# Altium PCB breather-pcb.PcbDoc
Units mm, origin at the board's own origin, x right, y up, seen from the top; angles counter-clockwise.
Board outline 54.33 x 74.28 mm, 2 copper layers (Top Layer, Bottom Layer); 61 components, 40 nets, 195 pads, 103 vias.
Unrouted connection lines stored in the file: 1.
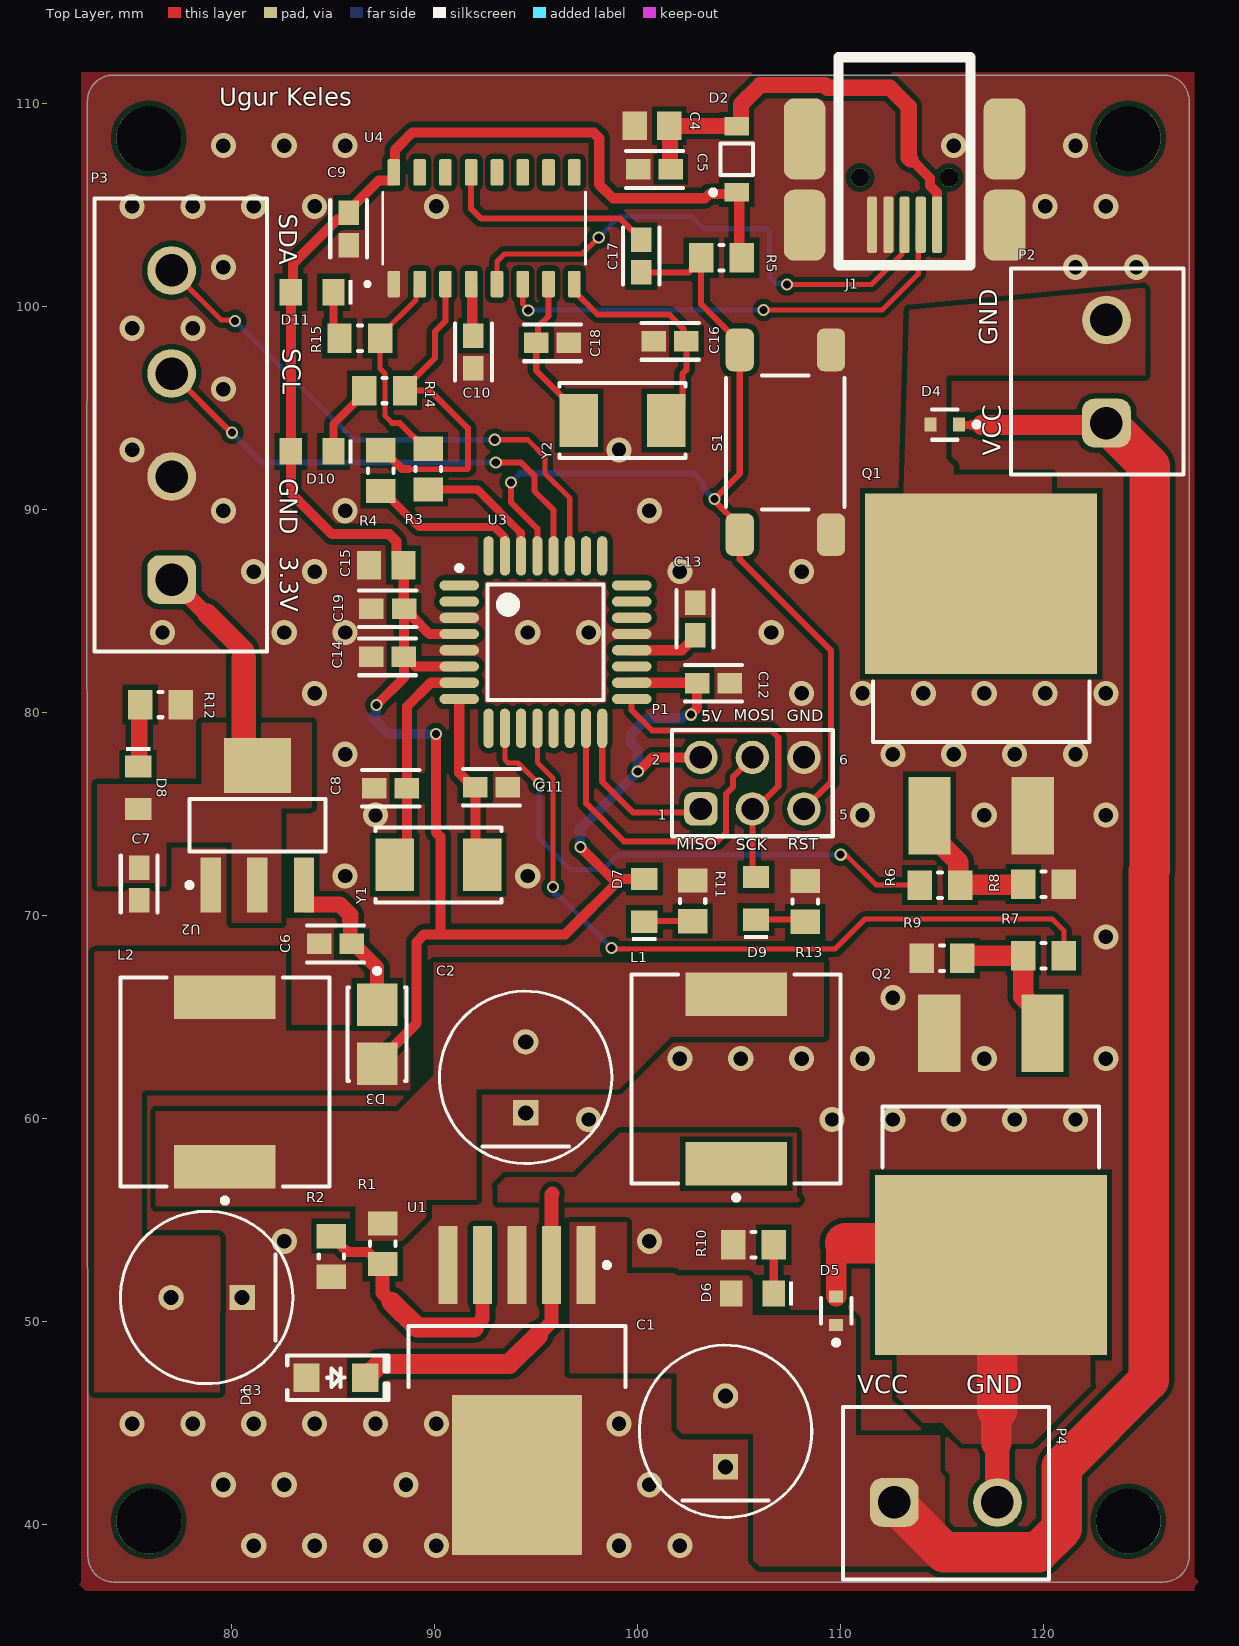
[diagram p0: Top Layer view]
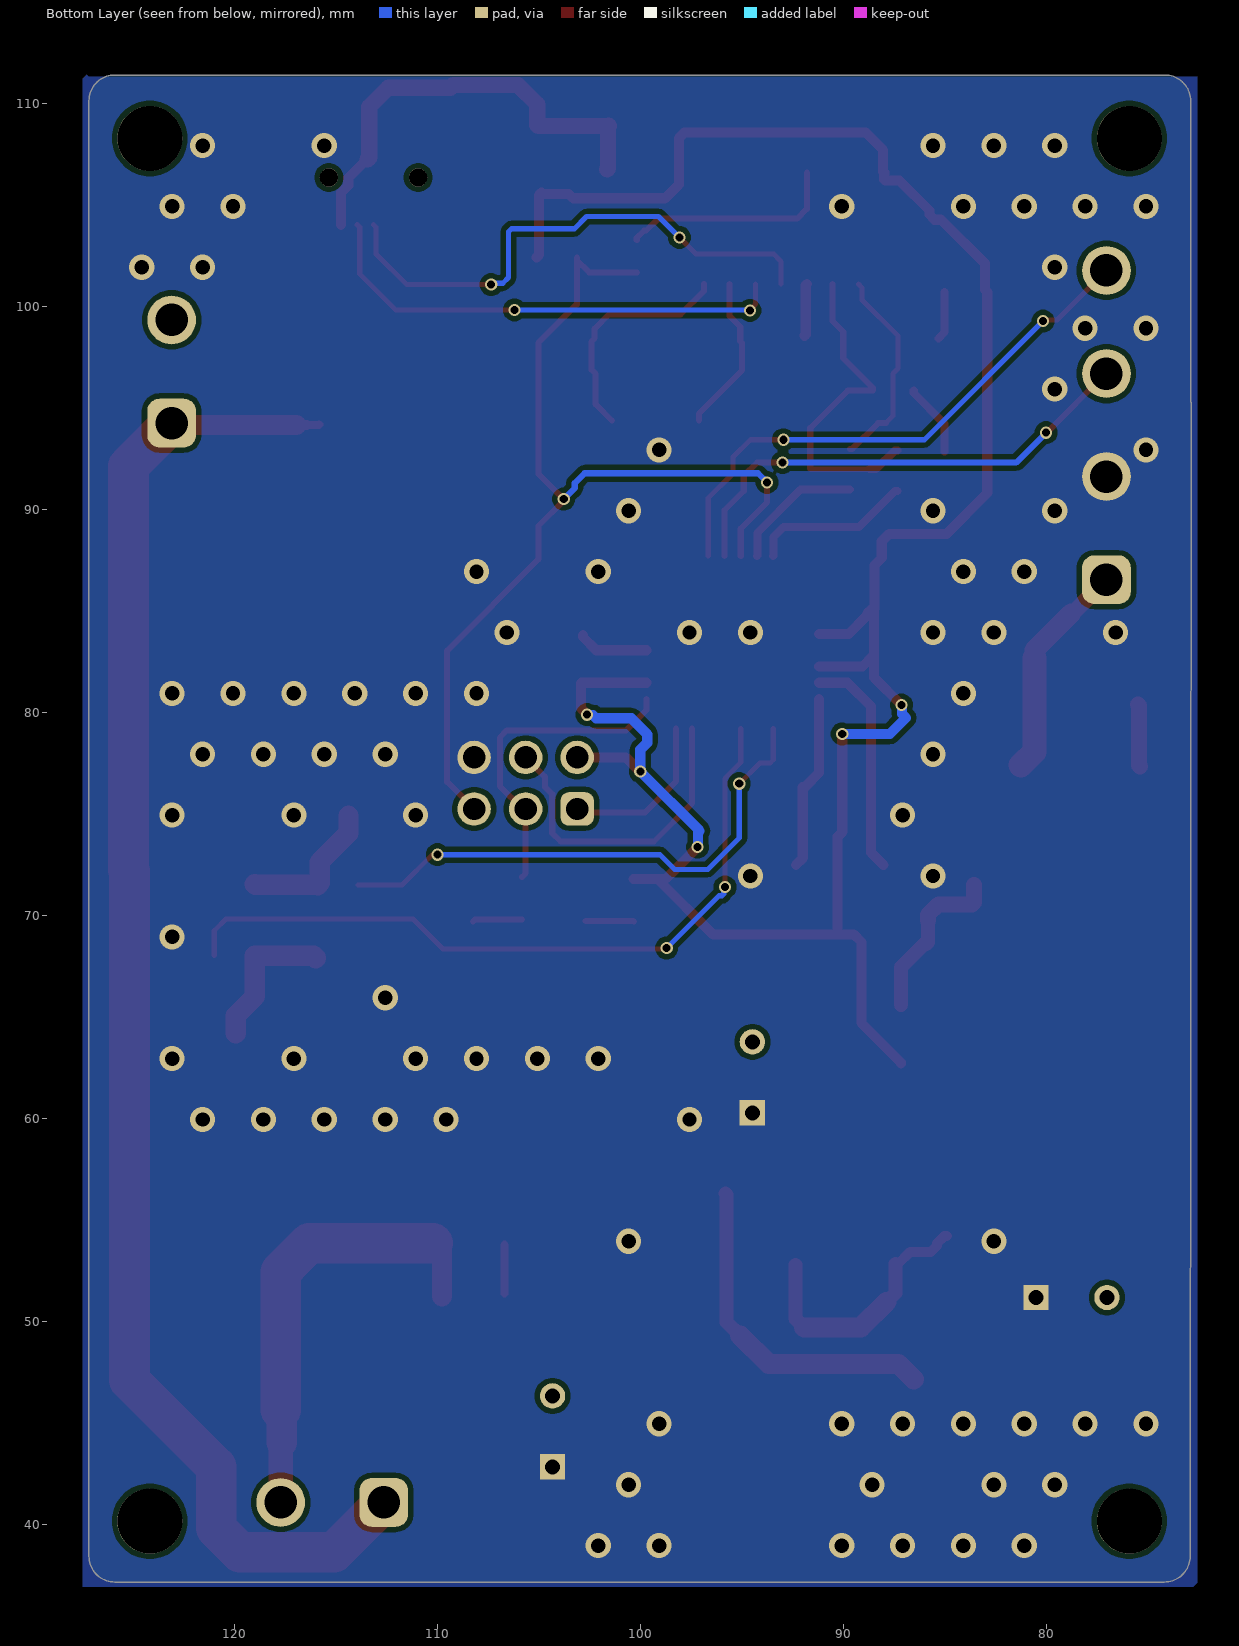
[diagram p1: Bottom Layer view, seen from below]
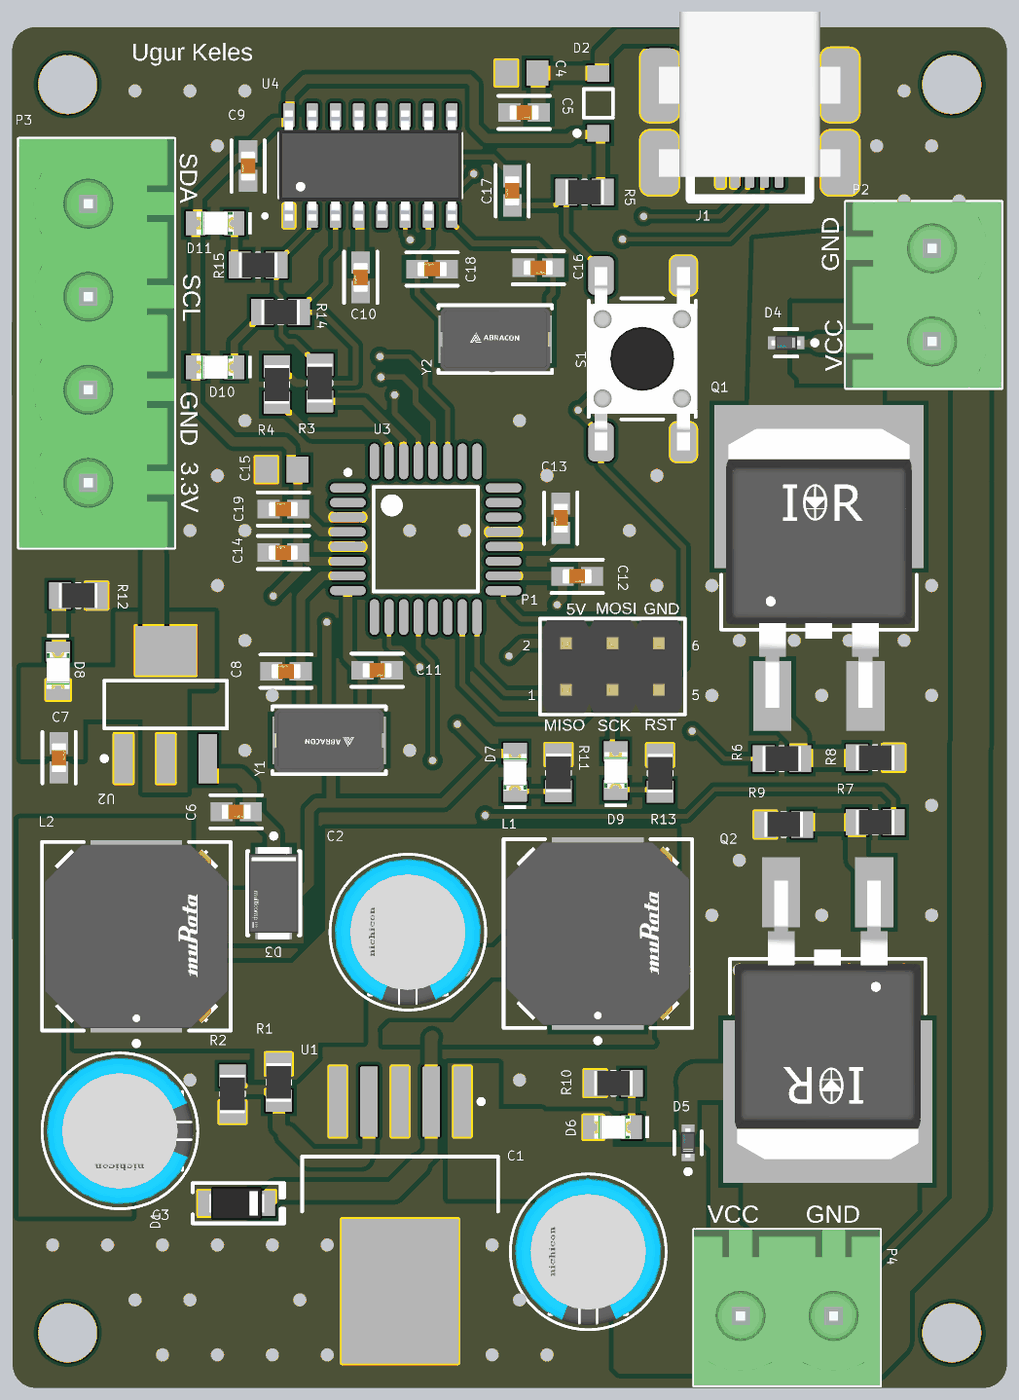
[diagram p2: 3D render of the assembled board from above, using the file's embedded part models]

## Layer stack, top to bottom
Top Solder: solder mask 0.0102, Solder Resist, Dk 3.5
Top Layer: signal copper 0.0356
Dielectric 1: dielectric 0.32, FR-4, Dk 4.8
Bottom Layer: signal copper 0.0356
Bottom Solder: solder mask 0.0102, Solder Resist, Dk 3.5

## Board outline
72.9,38.42 72.849,95.3 72.875,95.3 72.875,110.155 cw(c74.145,110.155) 74.145,111.425 125.905,111.425 cw(c125.905,110.155) 127.175,110.155 127.175,38.42 cw(c125.905,38.42) 125.905,37.15 74.17,37.15 cw(c74.17,38.42)

## Design rules (kind name [scope] priority, off if disabled: settings)
Clearance Clearance_1 [All] p1: gap=0.254 ignorepadtopadclearanceinfootprint=FALSE except(0: Arc-Hole Track-Hole SMDPad-Hole THPad-Hole Via-Hole Fill-Hole Poly-Hole Region-Hole Text-Hole)
Clearance [All] p2: gap=0.127 ignorepadtopadclearanceinfootprint=FALSE
PolygonConnect [All] p1: connectstyle=Direct reliefconductorwidth=0.254 reliefentries=4 polygonreliefangle="90 Angle" airgapwidth=0.254
RoutingVias [All] p1: holewidth=0.3 width=0.7 viastyle="Through Hole" minholewidth=0.4 minwidth=0.55 maxholewidth=0.254 maxwidth=0.8
SolderMaskExpansion [All] p1: expansion=0.102 istentingtop=FALSE
Width [All] p1: maxlimit=2 minlimit=0.2 preferedwidth=0.3 minimp=50.000000 maximp=50.000000 favimp=50.000000
30 further rules are at their usual default settings.

## Classes and differential pairs
component class power-breather: C1 C2 C3 C4 C5 C6 C7 D1 D2 D3 J1 L1 L2 R1 R2 U1 U2
component class mcu-breather: C8 C9 C10 C11 C12 C13 C14 C15 C16 C17 C18 C19 D4 D5 D6 D7 D8 D9 D10 D11 P1 P2 P3 P4 Q1 Q2 R3 R4 R5 R6 R7 R8 R9 R10 R11 R12 R13 R14 R15 S1 U3 U4 Y1 Y2

## Components (designator, comment, footprint, x,y, rotation, side; value= is the part's Value field where it differs from the comment)
C1 "100u 50V" FP-UKA1H101MPD1TD-MFG 104.325,44.575 r90 top
C2 "220u 16V" FP-UKA1H101MPD1TD-MFG 94.475,62.025 r90 top
C3 "220u 16V" FP-UKA1H101MPD1TD-MFG 78.75,51.175 r180 top
C4 "4u7" CAPC2013X135X45NL10T25 100.7,108.925 r0 top
C5 "100n" FP-GRM188-0_1-e0_2_0_55-IPC_A 100.825,106.775 r0 top
C6 "100n" FP-GRM188-0_1-e0_2_0_55-IPC_A 85.102,68.6 r0 top
C7 "10n" FP-GRM188-0_1-e0_2_0_55-IPC_A 75.425,71.55 r90 top
C8 "22p" FP-GRM188-0_1-e0_2_0_55-IPC_A 87.823,76.275 r180 top
C9 "100n" FP-GRM188-0_1-e0_2_0_55-IPC_A 85.75,103.848 r270 top
C10 "100n" FP-GRM188-0_1-e0_2_0_55-IPC_A 91.9,97.773 r270 top
C11 "22p" FP-GRM188-0_1-e0_2_0_55-IPC_A 92.798,76.325 r0 top
C12 "100n" FP-GRM188-0_1-e0_2_0_55-IPC_A 103.723,81.45 r0 top
C13 "100n" FP-GRM188-0_1-e0_2_0_55-IPC_A 102.825,84.627 r270 top
C14 "100n" FP-GRM188-0_1-e0_2_0_55-IPC_A 87.673,82.75 r180 top
C15 "4u7" CAPC2013X135X45NL10T25 87.6,87.275 r180 top
C16 "22p" FP-GRM188-0_1-e0_2_0_55-IPC_A 101.598,98.3 r0 top
C17 "100n" FP-GRM188-0_1-e0_2_0_55-IPC_A 100.175,102.498 r270 top
C18 "22p" FP-GRM188-0_1-e0_2_0_55-IPC_A 95.798,98.225 r180 top
C19 "100n" FP-GRM188-0_1-e0_2_0_55-IPC_A 87.677,85.125 r180 top
D1 "VTVS3V3GSMF-M3-08" "SMF DO-219AB" 85.125,47.225 r0 top
D2 "MBR0520LT3G" ONSC-SOD-123-2-425-04_V 104.875,107.275 r90 top
D3 "1N4007 SMD" FP-1N4007_SMD-IPC_C 87.15,64.15 r270 top
D4 "1N4148WT-7" FP-SOD523-MFG 115.125,94.2 r180 top
D5 "1N4148WT-7" FP-SOD523-MFG 109.775,50.525 r90 top
D6 "150080RS75000" WL-SMCW_0805_150080xx75000 105.65,51.375 r180 top
D7 "150080RS75000" WL-SMCW_0805_150080xx75000 100.325,70.75 r90 top
D8 "150080RS75000" WL-SMCW_0805_150080xx75000 75.375,76.3 r270 top
D9 "150080RS75000" WL-SMCW_0805_150080xx75000 105.825,70.85 r90 top
D10 "150080RS75000" WL-SMCW_0805_150080xx75000 83.95,92.875 r180 top
D11 "150080RS75000" WL-SMCW_0805_150080xx75000 83.95,100.725 r180 top
J1 "67503-1020" MOLX-67503-1020_V 114.75,104.05 r270 top
L1 "33uH" FP-DEM10050C-MFG 104.85,61.95 r90 top
L2 "33uH" FP-DEM10050C-MFG 79.65,61.8 r90 top
P1 "61300621121" 61300621121 105.65,76.525 r0 top
P2 "691311500002" 691311500002 122.65,96.815 r90 top
P3 "691311500104" 691311500104 77.475,94.175 r90 top
P4 "691311500002" 691311500002 115.185,41.525 r0 top
Q1 "IRLZ44N" FP-PG-TO263-3-MFG 116.925,81.905 r0 top
Q2 "IRLZ44N" FP-PG-TO263-3-MFG 117.4,57.22 r180 top
R1 "3K" RESC2013X60X35ML10T20 87.425,53.825 r90 top
R2 "1K" RESC2013X60X35ML10T20 84.9,53.2 r90 top
R3 "1K" RESC2013X60X35ML10T20 89.675,92 r90 top
R4 "1K" RESC2013X60X35ML10T20 87.325,91.925 r90 top
R5 "1K" RESC2013X60X35ML10T20 104.125,102.425 r0 top
R6 "220R" RESC2013X60X35ML10T20 114.9,71.5 r180 top
R7 "220R" RESC2013X60X35ML10T20 120,68.025 r0 top
R8 "10K" RESC2013X60X35ML10T20 120,71.55 r0 top
R9 "10K" RESC2013X60X35ML10T20 115,67.9 r180 top
R10 "10K" RESC2013X60X35ML10T20 105.7,53.775 r180 top
R11 "1K" RESC2013X60X35ML10T20 102.7,70.725 r270 top
R12 "1K" RESC2013X60X35ML10T20 76.475,80.4 r180 top
R13 "220R" RESC2013X60X35ML10T20 108.25,70.7 r90 top
R14 "1K" RESC2013X60X35ML10T20 87.525,95.875 r180 top
R15 "1K" RESC2013X60X35ML10T20 86.3,98.45 r180 top
S1 "1977223-9" "TE FSM4JSMA" 107.275,93.325 r180 top
U1 "LM2596SX-ADJ/NOPB" KTT0005B_L 94.05,46.575 r270 top
U2 "AMS1117" SOT-223_M 81.25,74.45 r90 top
U3 "ATmega328P-AU" 32A_M 95.45,83.475 r0 top
U4 "CH340G" SOIC127P600X180-16N 92.425,103.875 r90 top
Y1 "16MHZ" FP-ABM7-MFG 90.175,72.5 r180 top
Y2 "12MHZ" FP-ABM7-MFG 99.25,94.4 r0 top

## Footprints (in the part's own frame and the unit in brackets; to place one, negate y for a bottom-side part, rotate by r counter-clockwise, add the part's x,y. Pads: shape width x height; smd on the part's side, far side on the other; paste and mask are expansions set on the pad)
32A_M [mm] "Thin QFP, 32-Leads, Body 7x7mm, Pitch 0.8mm, IPC Low Density"
  oval 1.95x0.5 smd: 1(-4.25,2.8) 2(-4.25,2) 3(-4.25,1.2) 4(-4.25,0.4) 5(-4.25,-0.4) 6(-4.25,-1.2) 7(-4.25,-2) 8(-4.25,-2.8) 17(4.25,-2.8) 18(4.25,-2) 19(4.25,-1.2) 20(4.25,-0.4) 21(4.25,0.4) 22(4.25,1.2) 23(4.25,2) 24(4.25,2.8)
  oval 0.5x1.95 smd: 9(-2.8,-4.25) 10(-2,-4.25) 11(-1.2,-4.25) 12(-0.4,-4.25) 13(0.4,-4.25) 14(1.2,-4.25) 15(2,-4.25) 16(2.8,-4.25) 25(2.8,4.25) 26(2,4.25) 27(1.2,4.25) 28(0.4,4.25) 29(-0.4,4.25) 30(-1.2,4.25) 31(-2,4.25) 32(-2.8,4.25)
  silkscreen extent -4.37,-2.85 2.85,3.77, body extent -3.5,-3.5 3.5,3.5, height 1.2
61300621121 [mm] "Pin Header, pitch 2.54 mm, THT, Vertical, dual row, 6p"
  rrect50% 1.65x1.65 hole 1.1: 1(-2.54,-1.27)
  round 1.65 hole 1.1: 2(-2.54,1.27) 3(0,-1.27) 4(0,1.27) 5(2.54,-1.27) 6(2.54,1.27)
  silkscreen extent -3.96,-2.62 3.96,2.62, body extent -3.81,-2.54 3.81,2.54, height 8.59
691311500002 [mm] "5,08mm - PCB Headers - Vertical - Opened ends -02p"
  rrect50% 2.4x2.4 hole 1.6: 1(-2.54,-0.45)
  round 2.4 hole 1.6: 2(2.54,-0.45)
  silkscreen extent -5.08,-4.25 5.08,4.25, body extent -5.08,-4.25 5.08,4.25, height 12.05
691311500104 [mm] "5,08mm - PCB Headers - Vertical - Closed ends -04p"
  rrect50% 2.4x2.4 hole 1.6: 1(-7.62,0.45)
  round 2.4 hole 1.6: 2(-2.54,0.45) 3(2.54,0.45) 4(7.62,0.45)
  silkscreen extent -11.16,-4.25 11.16,4.25, body extent -11.16,-4.25 11.16,4.25, height 12.05
CAPC2013X135X45NL10T25 [mm] "Chip Capacitor, 2-Leads, Body 2.00x1.25mm, IPC Medium Density"
  rect 1.2x1.4 smd: 1(-0.85,0) 2(0.85,0)
  body extent -1.05,-0.67 1.05,0.67, height 1.35
FP-1N4007_SMD-IPC_C [mm]
  rect 2.1x2 smd paste+0 mask+0: 1(-1.45,0) 2(1.45,0)
  silkscreen extent -3.25,-1.45 2.3,1.45, body extent -2.6,-1.55 2.6,1.55, height 0.25
FP-ABM7-MFG [mm]
  rect 1.9x2.6 smd paste+0 mask+0: 1(-2.15,0) 2(2.15,0)
  silkscreen extent -3.1,-1.85 3.1,1.85, body extent -3.2,-1.95 3.2,1.95, height 0.25
FP-DEM10050C-MFG [mm]
  rect 2.15x5 smd paste+0 mask+0: 1(-4.175,0) 2(4.175,0)
  silkscreen extent -5.97,-5.15 5.15,5.15, body extent -5.35,-5.25 5.35,5.25, height 0.25
FP-GRM188-0_1-e0_2_0_55-IPC_A [mm]
  rect 1.208x1.012 smd paste+0 mask+0: 1(-0.802,0) 2(0.802,0)
  silkscreen extent -1.41,-0.91 1.41,0.91, body extent -1.91,-1.01 1.91,1.01, height 0.25
FP-PG-TO263-3-MFG [mm]
  rect 2.08x3.81 smd paste+0 mask+0: 1(-2.54,-6.985) 3(2.54,-6.985)
  rect 11.43x8.89 smd paste+0 mask+0: 4(0,4.445)
  silkscreen extent -5.34,-3.36 5.34,-0.38, body extent -5.81,-8.99 5.81,8.99, height 0.25
FP-SOD523-MFG [mm]
  rect 0.6x0.7 smd paste+0 mask+0: 1(-0.7,0) 2(0.7,0)
  silkscreen extent -1.7,-0.75 0.63,0.75, body extent -1.1,-0.53 1.1,0.53, height 0.25
FP-UKA1H101MPD1TD-MFG [mm]
  rect 1.25x1.25 hole 0.75 paste-2539.97 mask+0: 1(-1.75,0)
  round 1.25 hole 0.75 paste-2539.97 mask+0: 2(1.75,0)
  silkscreen extent -4.25,-4.25 4.25,4.25, body extent -4.35,-4.35 4.35,4.35, height 0.25
KTT0005B_L [mm] "DPAK, 5-Leads, Body 10.65x9.65mm, Pitch 1.7mm, IPC High Density"
  rrect11% 3.85x0.95 smd: 1(-6.2,3.4) 2(-6.2,1.7) 3(-6.2,0) 4(-6.2,-1.7) 5(-6.2,-3.4)
  rrect2% 7.9x6.4 smd: 6(4.15,0)
  silkscreen extent -6.32,-5.35 -0.2,5.35, body extent -3.2,-5.32 6.45,5.33, height 4.83
MOLX-67503-1020_V [mm] "Mini USB Connector, SMT, Righer Angle"
  rrect50% 2.8x0.5 smd: 1(0,0) 2(0,-0.8) 3(0,-1.6) 4(0,-2.4) 5(0,-3.2)
  rrect50% 3.5x2.05 smd: 6(0.025,3.325) 8(0.025,-6.525)
  rrect50% 4x2.05 smd: 7(-4.225,3.325) 9(-4.225,-6.525)
  round 0.9 hole 0.9 unplated: X(-2.325,-3.8) Y(-2.325,0.6)
  silkscreen extent -8.25,-4.85 2,1.65, body extent -8.22,-6.56 0.78,3.34, height 3.95
ONSC-SOD-123-2-425-04_V [mm] "SOD, 2-Leads, Body 2.69x1.6mm"
  rect 0.91x1.22 smd: 1(-1.635,0) 2(1.635,0)
  silkscreen extent -1.76,-0.8 0.78,1.28, body extent -1.35,-0.8 1.35,0.8, height 1.35
RESC2013X60X35ML10T20 [mm] "Chip Resistor, 2-Leads, Body 2.1x1.35mm, IPC Low Density"
  rect 1.2x1.45 smd: 1(-1,0) 2(1,0)
  silkscreen extent -0.1,-0.63 0.1,0.63, body extent -1.05,-0.68 1.05,0.67, height 0.6
"SMF DO-219AB" [mm] "Molded Diode, 2-Leads, Body 3.90x1.90mm, IPC Medium Density"
  rect 1.3x1.4 smd: 1(-1.45,0) 2(1.45,0)
  silkscreen extent -2.4,-1.1 2.59,1.1, body extent -1.5,-0.9 1.5,0.9, height 1.18
SOIC127P600X180-16N [mm]
  rrect25% 1.31x0.62 smd: 1(-2.75,4.445) 2(-2.75,3.175) 3(-2.75,1.905) 4(-2.75,0.635) 5(-2.75,-0.635) 6(-2.75,-1.905) 7(-2.75,-3.175) 8(-2.75,-4.445) 9(2.75,-4.445) 10(2.75,-3.175) 11(2.75,-1.905) 12(2.75,-0.635) 13(2.75,0.635) 14(2.75,1.905) 15(2.75,3.175) 16(2.75,4.445)
  silkscreen extent -2.85,-5 1.78,5.85, body extent -3,-5 3,5, height 1.8
SOT-223_M [mm] "SOT223, 4-Leads, Body 6.5x3.5mm, Pitch 2.3mm, Lead Span 7mm, IPC Low Density"
  rect 2.7x1 smd: 1(-2.95,2.3) 2(-2.95,0) 3(-2.95,-2.3)
  rect 2.7x3.3 smd: 4(2.95,0)
  silkscreen extent -3.07,-3.35 1.3,3.47, body extent -1.85,-3.35 1.85,3.35, height 1.8
"TE FSM4JSMA" [mm]
  rrect50% 1.4x2.1 smd: 1(2.25,4.55) 2(2.25,-4.55) 3(-2.25,4.55) 4(-2.25,-4.55)
  silkscreen extent -2.92,-3.3 2.92,3.3, body extent -3,-5 3,5, height 5.08
WL-SMCW_0805_150080xx75000 [mm] "SMD Mono-color Chip LED, body 2.0x1.25mm"
  rect 1.1x1.3 smd: 1(-1.05,0) 2(1.05,0)
  silkscreen extent -2,-0.6 -1.8,0.6, body extent -1,-0.63 1,0.62, height 0.7

## Part data
C1 C2 C3: library part CMP-12462-000027-1, "CAP ALUM 100UF 20% 50V RADIAL", Capacitance=100uF, Case/Package=Radial, Leakage Current=4uA, Max Operating Temperature=105°C, Min Operating Temperature=-55°C, Package Quantity=1, Ripple Current=190mA, Tolerance=20%, Voltage Rating=50V, Diameter=8mm, Height=11.5mm, Height - Seated (Max)=0.512inch, Lead Pitch=3.5mm, Length=11.5mm, Life (Hours)=2000Hour, Mount="Through Hole", Packaging="Tape and Reel", REACH SVHC="No SVHC", Series=KA, Termination=Radial, Voltage Rating (DC)=50V
C4 C15: library part CMP-2007-03607-1, Manufacturer=Murata, Part Number=GRM21BR72E103KW03L
C5 C6 C7 C8 C9 C10 C11 C12 C13 C14 C16 C17 C18 C19: library part CMP-2006-02792-2, "Chip Multilayer Ceramic Capacitors for General Purpose, 0603, 10uF, X5R, 15%, 20%, 6.3V", Capacitance=10uF, Case Code (Metric)=1608, Case Code (Imperial)=0603, Dielectric=X5R, Max Operating Temperature=85°C, Min Operating Temperature=-55°C, Package Quantity=4000, Tolerance=20%, Voltage=6.3V, Case/Package=0603, Depth=0.8mm, Height=0.8mm, Lead Free="Lead Free", Length=1.6mm, Material=Ceramic, Mount="Surface Mount", Packaging="Tape and Reel", Radiation Hardening=No, REACH SVHC="No SVHC", Termination=SMD/SMT, Thickness=0.035inch, Voltage Rating=6.3V, Voltage Rating (DC)=6.3V, Width=0.031inch
D1: "ESD PROTECTION DIODE DO-219AB-M3", Capacitance @ Frequency="2095pF @ 1MHz", Current - Peak Pulse (10/1000µs)=43.99A, Manufacturer="Vishay Semiconductor Diodes Division", Operating Temperature="175°C (TJ)", Package / Case=DO-219AB, Power - Peak Pulse=400W, Power Line Protection=No, Supplier Device Package="DO-219AB (SMF)", Supplier Part Number 1=VTVS3V3GSMF-M3-08GICT-ND, Voltage - Breakdown (Min)=6.57V, Voltage - Clamping (Max) @ Ipp=8.9V, Voltage - Reverse Standoff (Typ)=3.3V, Applications="General Purpose", ComponentLink1Description=Datasheet, ComponentLink1URL=http://www.vishay.com/docs/85891/vtvs3v3asmf.pdf, ComponentLink2Description="DigiKey Link", ComponentLink2URL=http://digikey.com/product-detail/en/vishay-semiconductor-diodes-division/VTVS3V3GSMF-M3-08/VTVS3V3GSMF-M3-08GICT-ND/9467503, LastUpdated="2/8/2024 9:51:14 PM", Lifecycle Status=Active, Minimum Order=1, Mounting Type="Surface Mount", Packaging=TapeAndReel, Part Number=VTVS3V3GSMF-M3-08, Part Status=Active, PartId=5497, Price=0.21, Series=TransZorb®, Supplier 1=DigiKey, Type=Zener, Unidirectional Channels=1
D2: library part CMP-1055-00408-1, "Schottky Power Rectifier, 2-Pin SOD-123, Pb-Free, Tape and Reel", Manufacturer="On Semiconductor", ComponentLink1Description="Manufacturer URL", ComponentLink1URL=http://www.onsemi.com/, ComponentLink2Description=Datasheet, ComponentLink2URL=http://www.onsemi.cn/pub_link/Collateral/MBR0520LT1-D.PDF, ComponentLink3Description="Package Specification", ComponentLink3URL=http://www.onsemi.com/pub_link/Collateral/425-04.PDF, Configuration=Single, DatasheetVersion="Rev. 6", Mounting Technology="Surface Mount", PackageDescription="2-Pin SOD, Body 1.6 x 2.69 mm", PackageReference=SOD-123-2-425-04, PackageVersion="Rev. G, 10/2009", Packing="Tape and Reel", PartNumber=MBR0520LT3G, RoHS=TRUE, IFSM Max (A)=5.5
D3: library part CMP-12389-000001-1, "Rectifier, 1Kv, 1A, Do-214Ac Rohs Compliant: Yes"
D4 D5: library part CMP-2000-05518-3, "DIODE GEN PURP 80V 125MA SOD523", Average Rectified Current=125mA, Capacitance=2pF, Forward Current=250mA, Forward Voltage=1.25V, Max Forward Surge Current (Ifsm)=2A, Max Operating Temperature=150°C, Max Repetitive Reverse Voltage (Vrrm)=100V, Max Reverse Voltage (DC)=80V, Min Operating Temperature=-65°C, Package Quantity=3000, Peak Reverse Current=1uA, Power Dissipation=150mW, Contact Plating=Tin, Current Rating=125mA, Element Configuration=Single, Height=0.65mm, Lead Free="Lead Free", Length=0.9mm, Max Surge Current=2A, Mount="Surface Mount", Number of Pins=2, Output Current=125mA, Packaging="Tape and Reel", Peak Non-Repetitive Surge Current=2A, Polarity=Standard, Power Rating=150mW, Radiation Hardening=No, REACH SVHC="No SVHC", Recovery Time=4ns, Reverse Recovery Time=4ns, Voltage Rating (DC)=80V, Weight=3.5E-05oz, Width=1.3mm
D6 D7 D8 D9 D10 D11: library part CMP-1426-00011-2, Case Code (Metric)=2012, Case Code (Imperial)=0805, Color=Red, Forward Current=100mA, Forward Voltage=2V, Max Operating Temperature=85°C, Max Reverse Voltage (DC)=5V, Min Operating Temperature=-40°C, Test Current=20mA, Case/Package=0805, Dominant Wavelength=625nm, Height=700µm, Length=2mm, Lens Style="Clear, Rectangular", Luminous Intensity=150mcd, Mount="Surface Mount", NexarPartId=29717781, Packaging="Tape and Reel", Peak Wavelength=630nm, REACH SVHC=Unknown, RoHS=Compliant, Viewing Angle=140°, Wavelength=625nm, Width=1.25mm
J1: library part CMP-0411-00002-1, "USB, MINI, SMD, RA KME04-USBMU03A01", Manufacturer=Molex, ComponentLink1Description="Manufacturer URL", ComponentLink1URL=http://www.molex.com/, ComponentLink2Description=Datasheet, ComponentLink2URL=http://www.molex.com/pdm_docs/sd/675031020_sd.pdf, DatasheetVersion="Rev F, 06/2009", Mounting Technology="Surface Mount", PackageDescription="Mini USB Connector, SMT, Righer Angle", PackageReference=67503-1020, PartNumber=67503-1020, Terminal Pitch="0.8 mm"
L1 L2: library part CMP-06042-015462-1, "Shielded Wirewound Inductor 33uH 20% 2500mA 0.0936Ω SMD", Case/Package=SMD/SMT, Current Rating=2.5A, DC Resistance (DCR)=93.6mR, Resistor Type=Wirewound, Saturation Current=3.5A, Test Frequency=100kHz, Tolerance=20%, Core Material=Ferrite, Height - Seated (Max)=0.197inch, Length=0.394inch, Max DC Current=2.5A, Mount="Surface Mount", Number of Pins=2, Packaging="Tape and Reel", Shielding=Shielded, Width=0.394inch, Inductance=33uH
P1: library part CMP-1502-01072-2, Color=Black, Contact Resistance=20mΩ, Current Rating=3A, Max Operating Temperature=105°C, Min Operating Temperature=-40°C, Operating Supply Voltage=250V, Connector Type="Male Pin", Contact Material=Copper, Contact Mating Length=5.9944mm, Contact Plating=Gold, Gender=Male, Height=8.89mm, Lead Pitch=2.54mm, Mount="Through Hole", NexarPartId=32855529, Number of Contacts=6, Number of Pins=6, Number of Positions=6, Number of Rows=2, Orientation=Vertical, Packaging=Bulk, Pitch=2.54mm, REACH SVHC=Unknown, RoHS=Compliant, Row Spacing=2.54mm, Termination=Solder, Voltage Rating=250V
P2 P4: library part CMP-1502-02123-2, Color=Green, Current=20A, Voltage=300V, Contact Material=Brass, Contact Plating=Tin, Gender=Male, Height=12mm, Lead Pitch=5.08mm, Length=8.5mm, Mount="Through Hole", NexarPartId=8917741, Number of Contacts=2, Number of Levels=1, Number of Pins=2, Number of Positions Per Level=2, Number of Rows=1, Orientation=Vertical, Packaging=Box, Pitch=5.08mm, REACH SVHC=Unknown, RoHS=Compliant, Termination=Solder, Width=10.16mm
P3: library part CMP-1502-02148-2, Color=Green, Current=20A, Voltage=300V, Contact Material=Brass, Contact Plating=Tin, Gender=Male, Height=12mm, Lead Pitch=5.08mm, Length=8.5mm, Mount="Through Hole", NexarPartId=8917749, Number of Contacts=4, Number of Levels=1, Number of Pins=4, Number of Positions Per Level=4, Number of Rows=1, Orientation=Vertical, Packaging=Box, Pitch=5.08mm, REACH SVHC=Unknown, RoHS=Compliant, Termination=Solder, Width=22.32mm
Q1 Q2: library part CMP-32901-000495-1, "MOSFET N-CH 55V 47A D2PAK - IRLZ44NSTRLPBF", Case/Package=D2PAK, Continuous Drain Current (ID)=47A, Drain to Source Breakdown Voltage=55V, Drain to Source Resistance=35mR, Gate to Source Voltage (Vgs)=16V, Max Operating Temperature=175°C, Max Power Dissipation=3.8W, Min Operating Temperature=-55°C, Power Dissipation=110W, Threshold Voltage=2V, Input Capacitance=1.7nF, Drain to Source Voltage (Vdss)=55V, Element Configuration=Single, Halogen Free="Halogen Free", Height=0.19inch, Lead Free="Contains Lead", Length=0.42inch, Max Dual Supply Voltage=55V, Mount="Surface Mount", Number of Pins=3, Packaging="Tape and Reel", Rds On Max=22mR, REACH SVHC="No SVHC", RoHS Compliant=Yes, Turn-Off Delay Time=26ns, Turn-On Delay Time=11ns, Width=0.38inch
R1 R2 R3 R4 R5 R6 R7 R8 R9 R10 R11 R12 R13 R14 R15: library part CMP-2100-03671-1, "Chip Resistor, 1 KOhm, +/- 1%, 125 mW, -55 to 155 degC, 0805 (2012 Metric), RoHS, Tape and Reel", Case Code (Metric)=2012, Case Code (Imperial)=0805, Manufacturer=Yageo, Max Operating Temperature=155degC, Max Power Dissipation=125mW, Min Operating Temperature=-55degC, Package Description="2-Pin Surface Mounted Device, Body 2 x 1.25 mm", Package Quantity=1, Resistance=1KOhm, Temperature Coefficient=100ppm/degreesC, Tolerance=1%, Voltage Rating=150V, Case/Package=0805, Composition=ThickFilm, Datasheet URL=http://www.yageo.com/NewPortal/yageodocoutput?fileName=/pdf/R-Chip/PYu-RC_Group_51_RoHS_L_5.pdf, Datasheet Version="Rev. 5, 10/2016", Depth=1.25mm, Height=0.024inch, Lead Free=LeadFree, Length=0.079inch, Manufacturer URL=http://www.yageo.com/, Military Standard=Not, Number of Pins=2, Number of Terminations=2, Package Reference=0805, Packaging=TapeandReel, Power Rating=125mW, REACH SVHC=Unknown, RoHSCompliant=true, Termination=SMD/SMT, Voltage Rating (DC)=150V, Width=0.049inch
S1: "SWITCH TACTILE SPST-NO 0.05A 24V", Contact Rating @ Voltage="0.05A @ 24VDC", Manufacturer="TE Connectivity ALCOSWITCH Switches", Operating Force=160gf, Supplier Part Number 1=1977223-9-ND, Actuator Height off PCB, Vertical=5.00mm, Actuator Orientation="Top Actuated", Actuator Type=Standard, Circuit=SPST-NO, ComponentLink1Description=Datasheet, ComponentLink1URL=https://www.te.com/commerce/DocumentDelivery/DDEController?Action=srchrtrv&DocNm=1308111-1_SWITCHES_CORE_PROGRAM_CATALOG&DocType=CS&DocLang=English, ComponentLink2Description="DigiKey Link", ComponentLink2URL=http://digikey.com/product-detail/en/te-connectivity-alcoswitch-switches/1977223-9/1977223-9-ND/5597033, Illumination=Non-Illuminated, LastUpdated="8/30/2020 9:06:45 PM", Lifecycle Status=Active, Minimum Order=30000, Mounting Type="Surface Mount", Outline="6.00mm x 6.00mm", Packaging=Bulk, Part Number=1977223-9, Price=0.16, Series=FSMJSMA, Supplier 1=DigiKey, Switch Function=Off-Mom, Termination Style="Gull Wing"
U1: library part CMP-2000-06545-1, "Simple Switcher(R) Power Converter 150 kHz Step-Down Voltage Regulator, 3 A, 4.5 to 40 V, -40 to 125 degC, 5-Pin TO-263 (KTT), Green (RoHS & no Sb/Br), Tape and Reel", Manufacturer="Texas Instruments", Operating Temperature Max=125°C, Operating Temperature Min=-40°C, Operating Temperature Range=-40°Cto+125°C, Output Current=3A, Output Voltage=37V, Package Description="5-Pin Plastic Flange Mount, Body 10.16 x 8.925 mm, Pitch 1.7 mm", Package Reference=KTT5, Package Version="4200577-4/G, 01/2013", PartNumber=LM2596, Primary Input Voltage=40V, Voltage Regulator Case Style=TO-263, Datasheet URL=http://www.ti.com/lit/ds/symlink/lm2596.pdf, Datasheet Version="Rev. C, 04/2013", Manufacturer URL=http://www.ti.com/, Mounting Technology=SurfaceMount, MSL=MSL3-168hours, No. of Outputs=1, No. of Pins=5, Number of Outputs=1, Package URL=http://www.ti.com/litv/pdf/mpsf007e, SVHC=NoSVHC(19-Dec-2012)
U2: library part CMP-0244-00316-1, "1A, Low Drop Positive Voltage Regulator, 3.3V, 4-Pin SOT-223, Tape and Reel", ComponentLink1Description="Manufacturer URL", ComponentLink1URL=http://www.st.com, ComponentLink2Description=Datasheet, ComponentLink2URL=http://www.st.com/internet/com/TECHNICAL_RESOURCES/TECHNICAL_LITERATURE/DATASHEET/CD00002116.pdf, DatasheetVersion=2/12/2011, PackageDescription="4-Pin SOT-223 Package, 6.5 x 3.5 mm Body, 2.3 mm Pitch, 7 mm Lead Span", PackageReference=SOT-223, PackageVersion=2010
U3: library part CMP-0095-00269-2, "8-bit AVR Microcontroller, 32KB Flash, 1KB EEPROM, 2KB SRAM, 32-pin TQFP, Industrial Grade (-40°C to 85°C)", Code_JEDEC=MS-026-ABA, ComponentLink1Description="Manufacturer URL", ComponentLink1URL=http://www.atmel.com/, ComponentLink2Description="ATmega48A/48PA/88A/88PA/168A/168PA/328/328P Datasheet", ComponentLink2URL=http://www.atmel.com/dyn/resources/prod_documents/doc8271.pdf, ComponentLink3Description="ATmega48A/48PA/88A/88PA/168A/168PA/328/328P Summary", ComponentLink3URL=http://www.atmel.com/dyn/resources/prod_documents/8271S.pdf, DatasheetVersion="revD, May-2011", PackageDescription="32-Lead, 7x7x1.0 mm Body, 0.8mm Lead Pitch, Thin Profile Plastic Quad Flat Package (TQFP)", PackageReference=32A, PackageVersion="revC, Oct-2010", RevisionNote="DatasheetVersion & PackageVersion updated. URLs added."
U4: "USB Interface Integrated Circuit", Package=None, Availability="Not in stock", Check_prices=https://www.snapeda.com/parts/Ch340G/WCH/view-part/?ref=eda, MF=WCH, MP=Ch340G, Price=None, SnapEDA_Link=https://www.snapeda.com/parts/Ch340G/WCH/view-part/?ref=snap
Y1: library part CMP-27762-000095-1, "Crystal 16MHz ±20ppm 18pF SMD-2 6mm x 3.5mm - ABM7-16.000MHZ-D2Y-T", Case/Package=CSMD, ESR (Equivalent Series Resistance)=50R, Frequency=16MHz, Frequency Stability=30ppm, Frequency Tolerance=20ppm, Load Capacitance=18pF, Max Operating Temperature=85°C, Min Operating Temperature=-40°C, Operating Frequency="16 MHz", Package Quantity=1000, Resistor Type=Ceramic, Depth=3.5mm, Height=0.055inch, Lead Free="Lead Free", Length=6mm, Mount="Surface Mount", Number of Pins=2, Packaging="Tape and Reel", Radiation Hardening=No, Series=ABM7, Termination=SMD/SMT, Tolerance=20ppm, Width=3.3mm
Y2: library part CMP-27762-010912-1, "Crystal 12MHz ±20ppm 18pF SMD-2 6mm x 3.5mm - ABM7-12.000MHZ-D2Y-T", Case/Package=CSMD, ESR (Equivalent Series Resistance)=60R, Frequency=12MHz, Frequency Stability=30ppm, Frequency Tolerance=20ppm, Load Capacitance=18pF, Max Operating Temperature=85°C, Min Operating Temperature=-40°C, Operating Frequency="12 MHz", Package Quantity=1000, Resistor Type=Ceramic, Depth=3.5mm, Height=0.055inch, Lead Free="Lead Free", Length=6mm, Mount="Surface Mount", Number of Pins=2, Packaging="Tape and Reel", Radiation Hardening=No, Series=ABM7, Series Resistance=60R, Termination=SMD/SMT, Tolerance=20ppm, Width=0.138inch

## Free pads (board coordinates)
  round 3.2 hole 3.2: MH(75.9,40.15) MH(75.9,108.3) MH(124.175,40.15) MH(124.175,108.3)

## Via types
v1: diameter 1.24, hole 0.711, Top Layer to Bottom Layer, tented both sides, 84 vias
v2: diameter 0.6, hole 0.4, Top Layer to Bottom Layer, tented both sides, 19 vias

## Nets (pads, with @x,y where several pads share a name; then routed paths per layer and width w, separated by ;. In a path a pad name is that pad's centre, name@x,y a point inside that pad or via, vN(x,y) a via of type N, cw(c..) or ccw(c..) an arc to the next point about the centre after c; other vN are vias at no path point)
3.3V: C7.2 D8.2 P3.1 U2.2 U2.4 | length 10.9
  Top Layer w0.8: P3.1 78.705,84.875 78.775,84.875
  Top Layer w1: 78.775,84.875 80.575,83.075 80.575,82.675
  Top Layer w1.2: 80.575,82.675 80.575,78.075 U2.4
5V: C3.2 C9.1 C12.1 C14.1 C15.1 C19.1 D2.1 D3.2 D7.2 D10.2 D11.2 L2.2 P1.2 R5.2 U3.4 U3.6 U3.18 U4.16 | length 118.8
  Top Layer w0.5: v2(87.125,80.375) 88.475,81.725 C14.1 ; D3.2 87.15,62.75 89.1,64.7 89.1,68.7 89.475,69.075 90.275,69.075 ; C19.1@88.577,85.125 88.833,84.869 88.833,84.771 89.729,83.875 U3.4 ; v2(90.05,78.95) 90.05,74.111 90.275,73.886 90.275,69.075 ; U3.6 89.048,82.275 88.573,82.75 C14.1 ; v2(97.178,73.376) 97.178,73.372 98.75,71.8 99.15,71.8 ; U3.18 102.896,81.475 C12.1 102.921,80.223 102.625,79.927 v2(102.625,79.9) ; v2(100,77.1) 100.027,77.1 100.722,77.795 P1.2 ; D7.2 99.15,71.8 ; R5.2 105,102.55 105,105.515 D2.1 104.8,105.565 103.515,105.565 103.3,105.35 98.775,105.35 98.1,106.025 98.1,108.307 97.807,108.6 88.9,108.6 88.04,107.74 88.04,106.685 U4.16 87.98,106.28 87.92,106.22 87.222,106.22 85.75,104.748 C9.1 85.75,104.552 85.494,104.296 85.176,104.296 83.006,102.125 83.006,100.831 D11.2 D10.2 82.9,90.825 84.925,88.8 87.75,88.8 88.1,88.45 88.1,87.625 C15.1 88.464,87.261 88.464,85.139 88.477,85.127 C14.1 C14.1 ; 90.275,69.075 96.425,69.075 99.15,71.8
  Bottom Layer w0.5: v2(87.125,80.375) 87.106,80.356 87.106,79.942 86.907,79.743 87.7,78.95 v2(90.05,78.95) ; v2(97.178,73.376) 97.159,73.395 97.159,74.091 97.075,74.175 v2(100,77.1) 100,78.175 99.657,78.518 99.657,78.932 100.45,79.725 102.175,79.725 102.331,79.881 102.606,79.881 v2(102.625,79.9)
5VCC: D7.1 R11.2 | length 2.4
  Top Layer w0.3: D7.1 100.35,69.725 R11.2
33VCC: D8.1 R12.2 | length 3.1
  Top Layer w0.8: D8.1 75.425,77.4 75.425,80.35 R12.2
AREF: C13.2 U3.20 | length 3.5
  Top Layer w0.5: U3.20 102.173,83.075 102.825,83.727 C13.2
CH340_XTALI: C18.2 U4.7 Y2.1 | length 7.8
  Top Layer w0.3: U4.7 95.6,99.541 95.075,99.016 95.075,98.304 C18.2 94.996,96.854 97.1,94.75 Y2.1
CH340_XTALO: C16.2 U4.8 Y2.2 | length 11.5
  Top Layer w0.3: U4.8 96.87,100.78 98.025,99.625 101.55,99.625 102.25,98.925 102.25,98.45 C16.2 102.4,96.9 102.2,96.7 102.2,95.2 Y2.2
D0: R3.1 U3.30 | length 6.6
  Top Layer w0.4: R3.1 92.1,91 94.231,88.869 94.231,87.744 U3.30
D1: R4.1 U3.31 | length 8
  Top Layer w0.4: R4.1 87.45,90.925 89.225,89.15 92.175,89.15 92.179,89.154 92.942,89.154 93.431,88.665 93.431,87.744 U3.31
D6/TRIG1: R6.2 U3.10 | length 26.7
  Top Layer w0.254: U3.10 93.45,77.675 93.6,77.525 94.1,77.525 v2(95.125,76.5) ; v2(110,73) 110.25,73 111.75,71.5 R6.2
  Bottom Layer w0.254: v2(95.125,76.5) 95.125,73.824 96.674,72.275 98.3,72.275 99.025,73 v2(110,73)
D8/TRIG2: R7.2 U3.12 | length 36.8
  Top Layer w0.254: U3.12 95.05,77.538 95.825,76.763 v2(95.825,71.4) ; v2(98.7,68.4) 98.75,68.35 109.725,68.35 111.2,69.825 120.425,69.825 121,69.25 R7.2
  Bottom Layer w0.254: v2(95.825,71.4) 95.891,71.334 95.891,71.058 95.974,70.975 96.125,70.975 v2(98.7,68.4)
D+: J1.3 U4.5 | length 26.8
  Top Layer w0.254: U4.5 93.06,102.235 93.425,102.6 97.25,102.6 v2(98.075,103.425) ; v2(107.35,101.1) 111.516,101.1 113.027,102.611 113.027,103.927 J1.3
  Bottom Layer w0.254: v2(98.075,103.425) 99.1,104.45 102.65,104.45 103.25,103.85 106.351,103.85 106.5,103.701 106.5,101.45 106.784,101.166 107.284,101.166 v2(107.35,101.1)
D-: J1.2 U4.6 | length 23.9
  Top Layer w0.254: U4.6 94.33,100.134 94.6,99.864 v2(94.6,99.825) ; v2(106.2,99.85) 112.05,99.85 113.827,101.627 113.827,103.927 J1.2
  Bottom Layer w0.254: v2(94.6,99.825) 94.612,99.837 106.187,99.837 v2(106.2,99.85)
DTR: C17.1 U4.13 | length 10.9
  Top Layer w0.3: U4.13 91.79,104.835 92.275,104.35 99.125,104.35 99.721,103.754 99.819,103.754 100.175,103.398 C17.1
GND: C1.1 C2.1 C3.1 C4.1 C5.1 C6.1 C7.1 C8.2 C9.2 C10.2 C11.2 C12.2 C13.1 C14.2 C15.2 C16.1 C18.1 C19.2 D1.1 J1.4 J1.5 J1.6 J1.7 J1.8 J1.9 P1.6 P3.2 Q1.3 Q2.3 R2.1 R8.2 R9.2 R10.2 R11.1 R12.1 R13.2 S1.3 S1.4 U1.3 U1.5 U1.6 U2.1 U3.3 U3.5 U3.21 U4.1
  other v1: 81.075,38.95 84.075,38.95 87.075,38.95 90.075,38.95 99.075,38.95 102.075,38.95 79.575,41.95 82.575,41.95 88.575,41.95 100.575,41.95 75.075,44.95 78.075,44.95 81.075,44.95 84.075,44.95 87.075,44.95 90.075,44.95 99.075,44.95 82.575,53.95 100.575,53.95 97.575,59.95 109.575,59.95 112.575,59.95 115.575,59.95 118.575,59.95 121.575,59.95 102.075,62.95 105.075,62.95 108.075,62.95 111.075,62.95 117.075,62.95 123.075,62.95 112.575,65.95 123.075,68.95 85.575,71.95 94.575,71.95 87.075,74.95 111.075,74.95 117.075,74.95 123.075,74.95 85.575,77.95 112.575,77.95 115.575,77.95 118.575,77.95 121.575,77.95 84.075,80.95 108.075,80.95 111.075,80.95 114.075,80.95 117.075,80.95 120.075,80.95 123.075,80.95 76.575,83.95 82.575,83.95 85.575,83.95 94.575,83.95 97.575,83.95 106.575,83.95 81.075,86.95 84.075,86.95 102.075,86.95 108.075,86.95 79.575,89.95 85.575,89.95 100.575,89.95 75.075,92.95 99.075,92.95 79.575,95.95 75.075,98.95 78.075,98.95 79.575,101.95 121.575,101.95 124.575,101.95 75.075,104.95 78.075,104.95 81.075,104.95 84.075,104.95 90.075,104.95 120.075,104.95 123.075,104.95 79.575,107.95 82.575,107.95 85.575,107.95 115.575,107.95 121.575,107.95
LED/SCK: D9.2 P1.3 U3.17 | length 15.9
  Top Layer w0.3: U3.17 99.7,80.125 100.7,79.125 106.575,79.125 106.925,78.775 106.925,76.375 105.805,75.255 P1.3 105.65,72.075 D9.2
LRX: D11.1 R15.2 | length 2.4
  Top Layer w0.4: D11.1 85,98.75 R15.2
LSCK: D9.1 R13.1 | length 2.5
  Top Layer w0.3: D9.1 108.15,69.8 R13.1
LTX: D10.1 R14.2 | length 3.6
  Top Layer w0.4: D10.1 85,94.225 86.525,95.75 R14.2
LVCC: D6.1 R10.1 | length 2.4
  Top Layer w0.4: D6.1 R10.1
MCU_XTAL1: C8.1 U3.7 Y1.2 | length 11.1
  Top Layer w0.5: Y1.2 88.625,73.1 C8.1 88.625,80.3 89.8,81.475 U3.7
MCU_XTAL2: C11.1 U3.8 Y1.1 | length 8.7
  Top Layer w0.5: U3.8 91.2,77.023 91.898,76.325 C11.1 91.996,72.829 Y1.1
MISO: P1.1 U3.16 | length 8.2
  Top Layer w0.3: U3.16 98.25,76.6 99.775,75.075 102.93,75.075 P1.1
MOSI: P1.4 U3.15 | length 15.8
  Top Layer w0.3: U3.15 97.45,75.525 99.325,73.65 103.924,73.65 104.339,74.065 104.339,75.989 104.7,76.35 104.7,76.845 P1.4
NetC2_2: C2.2 L1.2 L2.1 R1.2
NetC6_2: C6.2 D3.1 U2.3 | length 8.4
  Top Layer w0.7: 85.825,69.75 85.825,68.679 C6.2 86.002,68.6 87.15,67.452 D3.1
  Top Layer w0.8: U2.3 83.55,70.65 83.65,70.55 85.306,70.55 85.825,70.031 85.825,69.75
NetD1_2: D1.2 L1.1 U1.2 | length 16.7
  Top Layer w0.7: 95.075,49.3 95.75,49.975 U1.2 95.75,56.25 95.8,56.3
  Top Layer w1: D1.2@86.53,47.145 87.285,47.9 93.675,47.9 95.075,49.3
NetQ1_1: Q1.1 R6.1 R8.1 | length 7.2
  Top Layer w1: Q1.1 114.385,74.055 115.8,72.64 115.8,71.6 R6.1 115.925,71.525 118.975,71.525 R8.1
NetQ2_1: Q2.1 R7.1 R9.1 | length 7.3
  Top Layer w1: R9.1 116,67.925 116.1,68.025 R7.1 119,66.01 119.94,65.07 Q2.1
NetR1_1: R1.1 R2.2 U1.4 | length 13
  Top Layer w0.5: R2.2 85.025,54.2 85.375,53.85 85.375,53.725 85.675,53.425 86.7,53.425 87.3,52.825 R1.1
  Top Layer w0.7: R1.1 87.425,51.4 87.875,50.95 ; 91.925,49.7 92.35,50.125 U1.4
  Top Layer w1: 87.875,50.95 89.125,49.7 91.925,49.7
RELAY1: D4.2 P2.2 Q1.4
RELAY2: D5.2 P4.2 Q2.4 | length 22.3
  Top Layer w1: D5.2 109.775,53.4 110.225,53.85
  Top Layer w1.2: 117.675,44.025 117.725,43.975 P4.2
  Top Layer w1.5: 117.675,44.025 117.675,45.6 117.725,45.65
  Top Layer w2: 110.225,53.85 116.325,53.85 Q2.4 117.725,52.45 117.725,45.65
RESET: C17.2 P1.5 R5.1 S1.1 S1.2 U3.29 | length 49.7
  Top Layer w0.3: v2(93.75,91.35) 93.75,90.375 95.05,89.075 U3.29 ; C17.2 102.521,101.696 R5.1@103.125,102.3 ; R5.1 R5.1@103.125,102.3 ; P1.5 109.525,76.59 109.525,83.05 105.025,87.55 S1.1 105.025,89.2 103.775,90.45 v2(103.775,90.525) 105.025,91.775 S1.2 105.025,98.225 103.125,100.125 R5.1@103.125,102.3
  Bottom Layer w0.3: v2(93.75,91.35) 94.2,91.8 102.749,91.8 103.233,91.316 103.233,91.067 v2(103.775,90.525)
RX: R3.2 R15.1 U4.2 | length 10.2
  Top Layer w0.254: 87.9,94.275 87.544,94.631 87.544,96.72 87.3,96.964 R15.1 87.3,98.575 89.067,100.342 89.067,100.942 U4.2
  Top Layer w0.3: 87.9,94.275 88.275,94.275 89.55,93 R3.2
SCL: P3.3 U3.28 | length 24.3
  Top Layer w0.3: P3.3 77.055,96.715 79.97,93.8 v2(80,93.8) ; v2(93,92.325) 94.25,92.325 94.9,91.675 94.9,90.925 95.85,89.975 U3.28
  Bottom Layer w0.3: v2(80,93.8) 81.475,92.325 v2(93,92.325)
SDA: P3.4 U3.27 | length 27.6
  Top Layer w0.254: P3.4 79.469,99.351 80.099,99.351 v2(80.15,99.3) ; v2(92.95,93.45) 94.575,93.45 95.431,92.594 95.431,91.794 96.65,90.575 U3.27
  Bottom Layer w0.254: v2(80.15,99.3) 86,93.45 v2(92.95,93.45)
TX: R4.2 R14.1 U4.3 | length 16.6
  Top Layer w0.254: 88.708,92 91.6,92 91.625,92.025
  Top Layer w0.3: U4.3 90.52,99.295 90,98.775 90,97.475 88.525,96 R14.1 89.775,95.875 91.625,94.025 91.625,92.025
  Top Layer w0.4: R4.2 87.45,92.925 88.375,92 88.708,92
V3: C10.1 U4.4 | length 2.6
  Top Layer w0.5: U4.4 91.845,101.07 91.845,98.63 C10.1
Vbus: C4.2 C5.2 D2.2 J1.1 | length 22.3
  Top Layer w0.5: 113.435,107.275 113.475,107.275 114.396,106.354 114.396,105.98 114.75,105.626 J1.1
  Top Layer w0.8: C4.2 C4.2@101.557,108.917 ; C5.2 101.588,106.813 101.588,108.887 C4.2@101.557,108.917 ; 113.435,107.275 113.356,107.354 113.356,109.869 112.425,110.8 109.35,110.8 109.221,110.929 106.029,110.929 105.085,109.985 105.085,108.965 105.03,108.91 D2.2 104.868,108.917 C4.2@101.557,108.917
VCC: C1.2 D4.1 D5.1 D6.2 P2.1 P4.1 U1.1 | length 74.2
  Top Layer w0.4: D4.1 115.85,94.175 116.45,94.175
  Top Layer w0.5: 116.45,94.175 116.95,94.175
  Top Layer w1: 116.95,94.175 123,94.175 P2.1
  Top Layer w2: P4.1 115.099,38.621 119.728,38.621 120.9,39.793 120.9,42.825 125.175,47.1 125.175,72.2 125.225,72.25 125.225,92.15 P2.1
pads on no net: J1.X J1.Y U3.1 U3.2 U3.9 U3.11 U3.13 U3.14 U3.19 U3.22 U3.23 U3.24 U3.25 U3.26 U3.32 U4.9 U4.10 U4.11 U4.12 U4.14 U4.15

## Polygon pours and split planes (outlines as drawn)
GND on Top Layer "GND_L01_P008" (solid, pour order 8): 72.6,111.575 72.675,111.575 127.425,111.575 127.425,37.4 127.65,37.175 127.425,36.95 127.425,36.725 72.8,36.725 72.475,37.05 72.575,37.15 72.575,111.575
no net on Top Layer "NONET_L01_P007" (solid, pour order 7): 107.975,56.025 107.825,56.175 107.825,59.3 99.125,59.3 96.925,57.1 93.5,57.1 93.075,56.675 93.1,56.65 93.1,55.875 107.875,55.875 107.95,55.95
RELAY1 on Top Layer "RELAY1_L01_P006" (solid, pour order 6): 125,97.275 125,100.944 113.377,99.859 112.935,85.24 113.375,84.8 120.4,84.8 120.4,91.05 120.4,91.725 120.225,91.725 115.575,91.725 115.575,92.15 115.2,92.525 115.2,96.5 115.375,96.675 115.425,96.625 125,96.625 125,97.375 124.975,97.4
RELAY2 on Top Layer "RELAY2_L01_P005" (solid, pour order 5): 115.85,44.05 115.925,43.975 119.475,43.975 122.325,46.825 122.3,46.85 122.3,54.4 112.9,54.4 112.8,54.5 112.775,54.475 112.775,46.225 112.825,46.225 114.05,45 115.025,45 115.025,44.95 116,43.975
3.3V on Top Layer "3.3V_L01_P004" (solid, pour order 4): 82.425,70.075 82.425,75.3 83.925,75.3 83.95,75.325 83.925,75.35 83.925,79.5 78.5,79.5 78.5,76.475 73.525,76.475 73.45,76.475 73.35,76.475 73.35,71.45 76.7,71.45 76.75,71.45 76.75,73.625 79.975,73.625 80,73.6 80,69.65 82.425,69.65
5V on Top Layer "5V_L01_P003" (solid, pour order 3): 79.4,46.7 79.4,46.6 79.4,46.5 73.2,46.5 73.2,68.35 73.3,68.25 82.65,68.25 82.65,64.675 82.65,64.325 89.025,64.325 89.15,64.2 88.775,63.825 88.775,61.4 75.7,61.4 75.55,61.25 75.55,54.225 79.275,54.225 79.425,54.225
NetC2_2 on Top Layer "NETC2_2_L01_P002" (solid, pour order 2): 109.175,67.675 109.175,64.025 101.65,64.025 99.075,61.45 92.875,61.45 92.05,61.45 92.05,56 89.575,56 89.575,55.15 88.4,53.975 86.1,53.975 86.1,55.675 85.575,55.675 76.25,55.675 76.25,60.35 86.4,60.35 88.175,60.35 89.95,62.125 89.95,67.675
VCC on Top Layer "VCC_L01_P001" (solid, pour order 1): 96.6,47.45 102.25,47.45 102.25,51.925 101.8,52.375 99.45,52.375 99.45,54.875 96.65,54.875 96.65,47.425 96.675,47.4
VCC on Top Layer "VCC_L01_P000" (solid, pour order 0): 115.125,42.35 115.125,37.925 106,37.925 105.7,38.225 105.7,44.45 102.2,44.45 101.925,44.725 101.925,52.25 105.45,52.25 105.65,52.05 105.65,50.3 110.55,50.3 110.75,50.1 110.75,44.4 110.775,44.375 114.9,44.375 114.9,42.575
GND on Bottom Layer "GND_L02_P010" (solid, pour order 10): 72.45,111.35 127.175,111.35 127.275,111.45 127.475,111.25 127.475,36.925 72.75,36.925 72.55,37.125 72.55,111.4

## Silkscreen, mask and mechanical layers (free items; w line width, h text height)
Top Overlay:
  text "Ugur Keles" at 79.375,109.612 h1.52
  text "SDA" at 82.028,104.583 h1.52 r270
  text "GND" at 118.009,98.1 h1.52 r90
  text "SCL" at 82.202,97.97 h1.52 r270
  text "VCC" at 118.184,92.651 h1.52 r90
  text "GND" at 82.066,91.55 h1.52 r270
  text "3.3V" at 82.091,87.7 h1.52 r270
  text "MOSI" at 104.727,79.404 h1
  text "GND" at 107.352,79.379 h1
  text "5V" at 103.125,79.361 h1
  text "RST" at 107.402,73.054 h1
  text "MISO" at 101.9,73.036 h1
  text "SCK" at 104.825,73.011 h1
  text "VCC" at 110.826,46.166 h1.52
  text "GND" at 116.2,46.166 h1.52

## Text inside footprints (layer, text, board x,y; h text height)
P1: Top Overlay "6" at 109.92,77.425 h0.5; Top Overlay "5" at 109.92,74.725 h0.5; Top Overlay "2" at 100.68,77.425 h0.5; Top Overlay "1" at 100.98,74.725 h0.5